# Altium PCB PCB1.PcbDoc
Units mm, origin at the board's own origin, x right, y up, seen from the top; angles counter-clockwise.
Board outline 50.67 x 19.43 mm, 2 copper layers (Top Layer, Bottom Layer); 9 components, 4 nets, 26 pads, 7 vias.
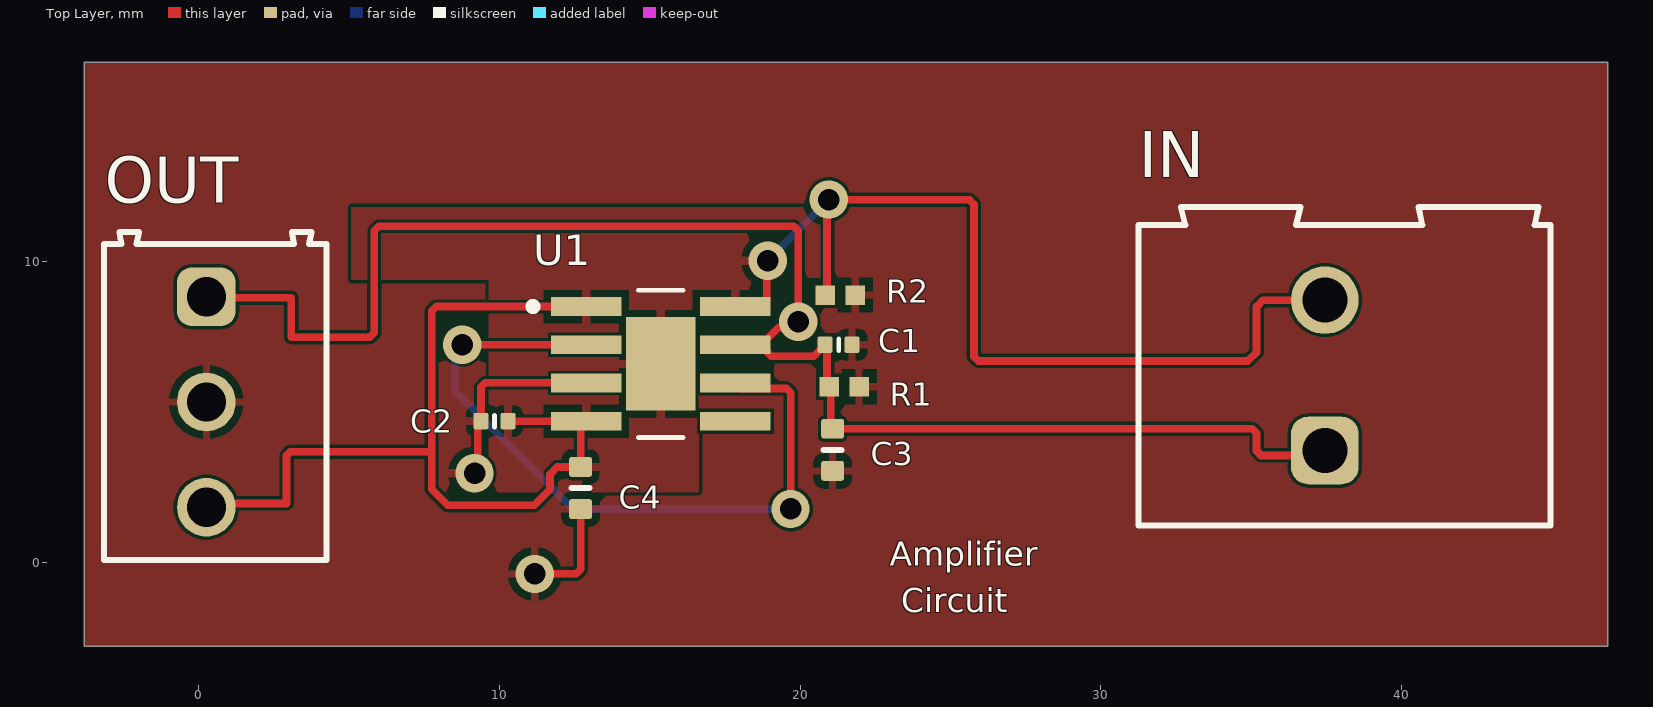
[diagram p0: Top Layer view]
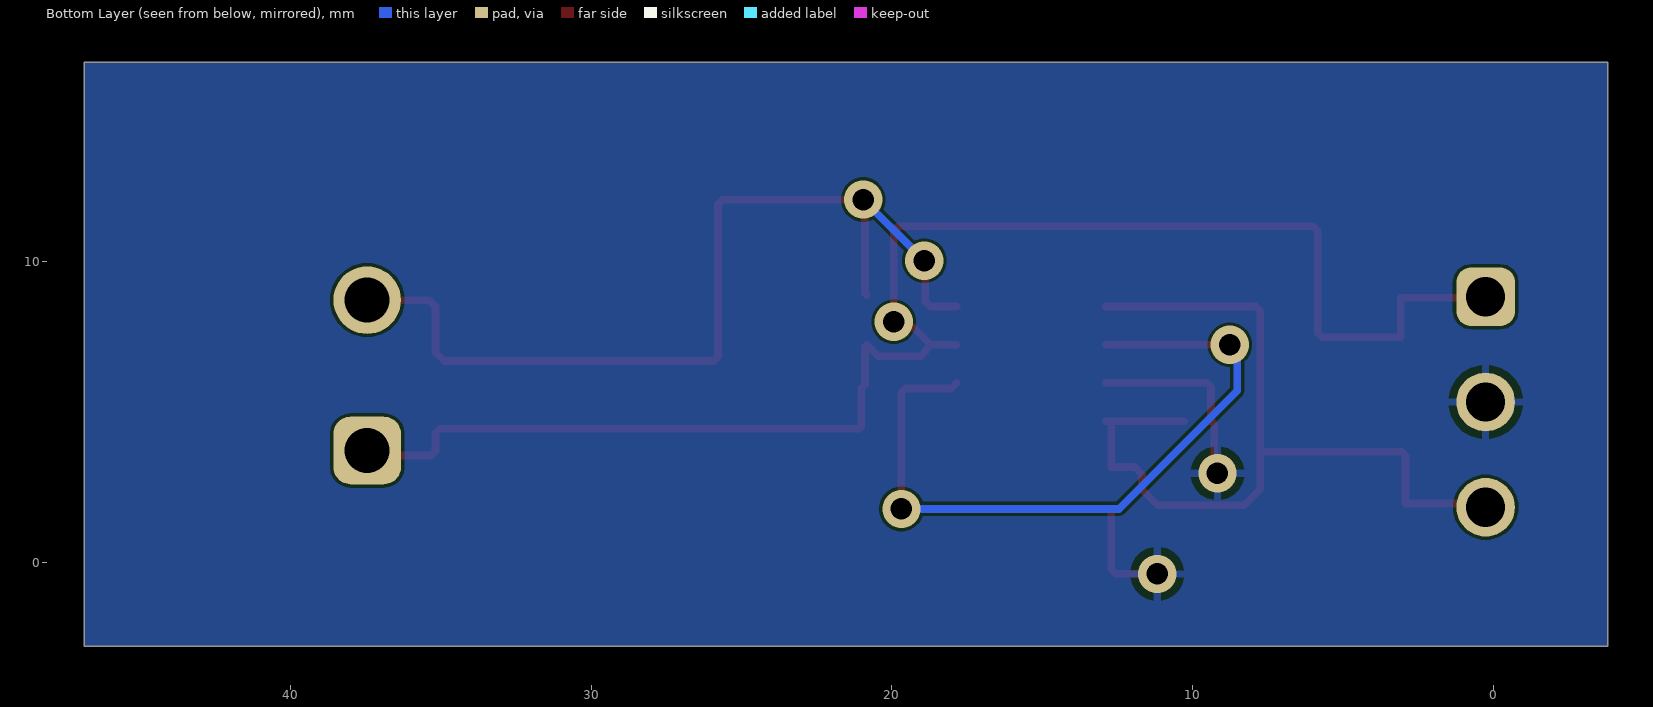
[diagram p1: Bottom Layer view, seen from below]
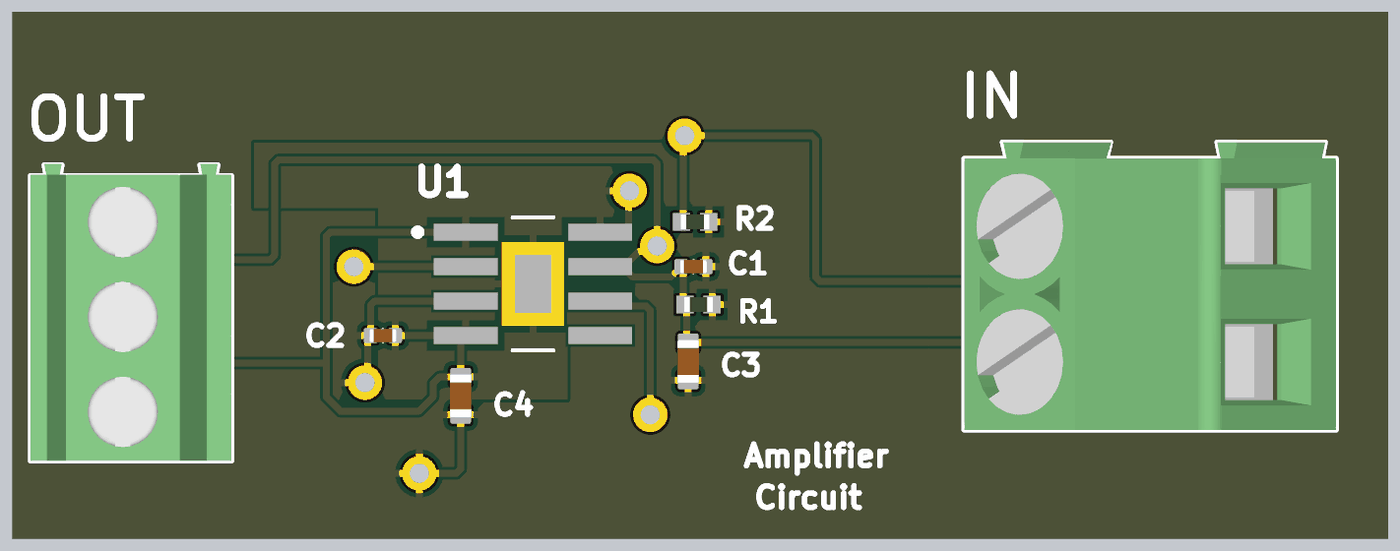
[diagram p2: 3D render of the assembled board from above, using the file's embedded part models]

## Layer stack, top to bottom
Top Solder: solder mask 0.0102, Solder Resist, Dk 3.5
Top Layer: signal copper 0.0356
Dielectric 1: dielectric 0.32, FR-4, Dk 4.8
Bottom Layer: signal copper 0.0356
Bottom Solder: solder mask 0.0102, Solder Resist, Dk 3.5

## Board outline
-3.81,-2.794 46.863,-2.794 46.863,16.637 -3.81,16.637

## Design rules (kind name [scope] priority, off if disabled: settings)
Clearance [All] p1: gap=0.102 ignorepadtopadclearanceinfootprint=FALSE
MinimumSolderMaskSliver [All] p1: minsoldermaskwidth=0.102
PolygonConnect [All] p1: connectstyle=Relief reliefconductorwidth=0.254 reliefentries=4 polygonreliefangle="90 Angle" airgapwidth=0.254
RoutingVias [All] p1: holewidth=0.711 width=1.27 viastyle="Through Hole" minholewidth=0.711 minwidth=1.27 maxholewidth=0.711 maxwidth=1.27
SilkToSolderMaskClearance [IsPad] p1: minsilkscreentomaskgap=0.102 clearancetoexposedcopper=TRUE
SolderMaskExpansion [All] p1: expansion=0.102 istentingtop=FALSE
SupplyNets "Schematic Supply Nets" [InNet('GND')] p1: voltage=0.000
Width [All] p1: maxlimit=0.254 minlimit=0.254 preferedwidth=0.254
28 further rules are at their usual default settings.

## Classes and differential pairs
component class Amplifierschematic: C1 C2 C3 C4 R1 R2 U1

## Components (designator, comment, footprint, x,y, rotation, side; value= is the part's Value field where it differs from the comment)
C1 "Capacitor 100nF +/-20% 10V 0402" CAPC0402(1005)60_L 21.278,7.239 r180 top value=100nF
C2 "Capacitor 100nF +/-20% 10V 0402" CAPC0402(1005)60_L 9.837,4.699 r180 top value=100nF
C3 "Capacitor 10µF +/-20% 10V 0603" CAPC0603(1608)100_L 21.082,3.745 r270 top value=10µF
C4 "Capacitor 10µF +/-20% 10V 0603" CAPC0603(1608)100_L 12.7,2.475 r90 top value=10µF
IN "691211720002" 691211720002 38.1,6.223 r90 top
OUT "691214110003" 691214110003 0.554,5.334 r270 top
R1 "Resistor 10k +/-1% 0402 100 mW" RESC1005X40X25ML05T05 21.463,5.842 r180 top value=10k
R2 "Resistor 10k +/-1% 0402 100 mW" RESC1005X40X25ML05T05 21.336,8.89 r0 top value=10k
U1 "OPA455IDDA" DDA0008J-IPC_A 15.367,6.604 r0 top

## Footprints (in the part's own frame and the unit in brackets; to place one, negate y for a bottom-side part, rotate by r counter-clockwise, add the part's x,y. Pads: shape width x height; smd on the part's side, far side on the other; paste and mask are expansions set on the pad)
691211720002 [mm] "5,00mm - modular - green -45¡ã entry with rising cage clamp - 02p"
  rrect50% 2.25x2.25 hole 1.5: 1(-2.5,0.65)
  round 2.25 hole 1.5: 2(2.5,0.65)
  silkscreen extent -5,-6.85 5.6,6.85, body extent -5,-6.85 5.6,6.85, height 15.72
691214110003 [mm] "3.50 mm Horizontal Entry Modular, 3p"
  rrect50% 1.95x1.95 hole 1.3: 1(-3.5,-0.3)
  round 1.95 hole 1.3: 2(0,-0.3) 3(3.5,-0.3)
  silkscreen extent -5.65,-3.7 5.25,3.7, body extent -5.7,-3.7 5.25,3.7, height 8.55
CAPC0402(1005)60_L [mm] "Chip Capacitor, Body 1.0x0.5mm, Height 0.6mm, IPC High Density"
  rrect25% 0.5x0.55 smd: 1(-0.45,0) 2(0.45,0)
  silkscreen extent 0,-0.2 0,0.2, body extent -0.5,-0.25 0.5,0.25, height 0.6
CAPC0603(1608)100_L [mm] "Chip Capacitor, Body 1.6x0.8mm, Height 1.0mm, IPC High Density"
  rrect25% 0.66x0.76 smd: 1(-0.7,0) 2(0.7,0)
  silkscreen extent 0,-0.3 0,0.3, body extent -0.8,-0.4 0.8,0.4, height 0.95
DDA0008J-IPC_A [mm]
  rect 2.353x0.622 smd paste+0 mask+0: 1(-2.477,1.905) 2(-2.477,0.635) 3(-2.477,-0.635) 4(-2.477,-1.905) 5(2.477,-1.905) 6(2.477,-0.635) 7(2.477,0.635) 8(2.477,1.905)
  rect 2.3x3.1 smd paste-1.537 mask+0: 9(0,0)
  silkscreen extent -4.37,-2.45 0.75,2.45
RESC1005X40X25ML05T05 [mm] "Chip Resistor, 2-Leads, Body 1.05x0.55mm, IPC Low Density"
  rect 0.65x0.65 smd: 1(-0.5,0) 2(0.5,0)
  body extent -0.53,-0.28 0.53,0.28, height 0.4

## Part data
C1 C2: library part CMP-001-00061-3, "Chip Capacitor, 100nF +/-20%, 10V, 0402, Thickness 0.6 mm", Case/Package=0402, Max Operating Temperature=85°C, Min Operating Temperature=-55°C, Tolerance=20%, Voltage Rating=10V, Mounting Technology=SMT, Pins=2
C3 C4: library part CMP-001-00075-4, "Chip Capacitor, 10µF +/-20%, 10V, 0603, Thickness 1 mm", Case/Package=0603, Max Operating Temperature=85°C, Min Operating Temperature=-55°C, Tolerance=10%, Voltage Rating=10V, Mounting Technology=SMT, Pins=2
IN: library part CMP-1502-02524-3, "211 Series 5MM Pitch Straight, Pcb Terminal Block, Through Hole, 2 Way", Color=Green, Current=10A, Max Operating Temperature=105°C, Min Operating Temperature=-40°C, Voltage=300V, Connector Type="PCB, Terminal Block", Contact Material=Brass, Contact Plating=Tin, Height=15.5mm, Housing Material=Nylon, Lead Pitch=5mm, Length=13.7mm, Mount="Through Hole", Number of Contacts=2, Number of Levels=1, Number of Pins=2, Number of Positions Per Level=2, Packaging=Box, Pitch=5.0038mm, Plating="Brass, Steel", REACH SVHC=Unknown, RoHS=Compliant, Stripping Length=-7mm, Termination=Screw, Width=10mm, Wire Gauge (Max)=24AWG, Wire Gauge (Min)=12AWG, Wire/Cable Gauge=12AWG
OUT: library part CMP-1502-02466-3, "2141 Series 3.5MM Pitch Straight, Pcb Terminal Block, Through Hole, 3 Way", Color="Blue, Green", Current=10A, Max Operating Temperature=105°C, Min Operating Temperature=-40°C, Voltage=300V, Contact Material=Brass, Contact Plating="Brass, Tin", Current Rating=10A, Height=12.2mm, Housing Material=Nylon, Lead Pitch=3.5mm, Length=7.4mm, Mount="Through Hole", Number of Contacts=3, Number of Levels=1, Number of Pins=3, Number of Positions Per Level=3, Packaging=Box, Pitch=3.5052mm, Plating="Brass, Steel", RoHS=Compliant, Stripping Length=-6mm, Termination=Screw, Voltage Rating=300V, Width=10.9mm, Wire Gauge (Max)=24AWG, Wire Gauge (Min)=16AWG, Wire/Cable Gauge=24AWG
R1 R2: library part CMP-009-00015-5, "Chip Resistor, 10 KOhm, +/- 1%, 0.1 W, -55 to 155 degC, 0402 (1005 Metric)", Case/Package=0402, Max Operating Temperature=155°C, Min Operating Temperature=-55°C, Power=100mW, Tolerance=1%, Voltage Rating=50V, Mounting Technology=SM, Pins=2, RoHS Compliant=True
U1: "150-V, wide bandwidth 6.5-MHz, high-slew rate 32-V/Âµs unity-gain stable op amp 8-SO PowerPAD -40 to 85", Manufacturer_Name="Texas Instruments", Copyright="Copyright (C) 2026 Ultra Librarian. All rights reserved.", Datasheet=https://www.ti.com/lit/gpn/opa455, Manufacturer_Part_Number=OPA455IDDA, RefDes=RefDes, Type=TYPE

## Via types
v1: diameter 1.27, hole 0.711, Top Layer to Bottom Layer, 7 vias

## Nets (pads, with @x,y where several pads share a name; then routed paths per layer and width w, separated by ;. In a path a pad name is that pad's centre, name@x,y a point inside that pad or via, vN(x,y) a via of type N, cw(c..) or ccw(c..) an arc to the next point about the centre after c; other vN are vias at no path point)
0_RETURN: C2.1 C4.2 IN.2 OUT.3 R2.1 U1.1 U1.4 U1.8 U1.9 | length 62.4
  Top Layer w0.254: OUT.3 0.381,1.961 2.921,1.961 2.921,3.556 3.048,3.683 7.747,3.683 ; C2.1 U1.4 ; U1.4@12.7,4.509 C4.2 11.924,3.175 11.684,2.935 11.684,2.435 11.154,1.905 8.277,1.905 7.747,2.435 7.747,3.683 ; U1.1 7.896,8.509 7.747,8.36 7.747,3.683 ; U1.8 18.709,8.509 18.893,8.693 18.893,10.003 v1(18.923,10.033) ; R2.1 20.896,8.949 20.896,12.006 v1(20.955,12.065) 25.632,12.065 25.781,11.916 25.781,6.848 25.93,6.699 34.893,6.699 35.179,6.985 35.179,8.509 35.393,8.723 IN.2
  Bottom Layer w0.254: v1(18.923,10.033) 18.923,10.308 19.198,10.308 v1(20.955,12.065)
60_IN: C1.2 C3.1 IN.1 OUT.1 R1.2 U1.7 | length 53.4
  Top Layer w0.254: OUT.1 0.288,8.8 3.082,8.8 3.082,7.493 5.693,7.493 5.842,7.642 5.842,11.027 5.991,11.176 19.79,11.176 19.939,11.027 v1(19.939,8.001) 19.745,7.807 19.277,7.807 U1.7@18.709,7.239 ; IN.1 37.283,3.556 35.328,3.556 35.179,3.705 35.179,4.296 35.03,4.445 C3.1 21.023,4.504 21.023,5.782 20.896,5.909 20.896,7.171 C1.2 20.828,7.214 20.705,7.091 20.68,7.091 20.447,6.858 19.042,6.858 18.893,7.007 18.893,7.055 U1.7@18.709,7.239 ; U1.7@18.709,7.239 U1.7 U1.7@18.709,7.239
GND: C1.1 C2.2 C3.2 C4.1 OUT.2 R1.1 R2.2 U1.3 | length 10.1
  Top Layer w0.254: v1(9.175,2.963) 9.281,3.069 9.281,4.593 C2.2 9.387,5.82 9.536,5.969 U1.3 ; v1(11.176,-0.381) 12.551,-0.381 12.7,-0.232 C4.1
NetU1_2: U1.2 U1.6 | length 24.4
  Top Layer w0.254: v1(8.763,7.239) U1.2 ; U1.6 18.028,5.785 19.536,5.785 19.685,5.636 v1(19.685,1.778)
  Bottom Layer w0.254: v1(8.763,7.239) 8.763,7.037 8.511,6.785 8.511,5.713 12.446,1.778 v1(19.685,1.778)
pads on no net: U1.5

## Polygon pours and split planes (outlines as drawn)
0_RETURN on Top Layer "0_RETURN_L01_P001" (solid, pour order 1): 21.336,8.128 16.637,8.128 16.637,2.34 9.652,2.34 9.652,9.398 5.08,9.398 5.08,9.906 5.08,11.811 21.336,11.811
GND on Top Layer "GND_L01_P002" (solid, pour order 2): 46.863,16.637 46.863,-2.794 -3.81,-2.794 -3.81,16.637
GND on Bottom Layer "GND_L02_P003" (solid, pour order 3): -3.81,16.637 46.863,16.637 46.863,-2.794 -3.81,-2.794

## Silkscreen, mask and mechanical layers (free items; w line width, h text height)
Top Overlay:
  text "Amplifier" at 22.987,-0.114 h0.8
  text "Circuit" at 23.368,-1.651 h0.8